# Altium PCB pcb_LAB_main.PcbDoc
Units mil, origin at the board's own origin, x right, y up, seen from the top; angles counter-clockwise.
Board outline 6750 x 6451.58 mil, 2 copper layers (Top Layer, Bottom Layer); 127 components, 63 nets, 386 pads, 33 vias.
Unrouted connection lines stored in the file: 1.
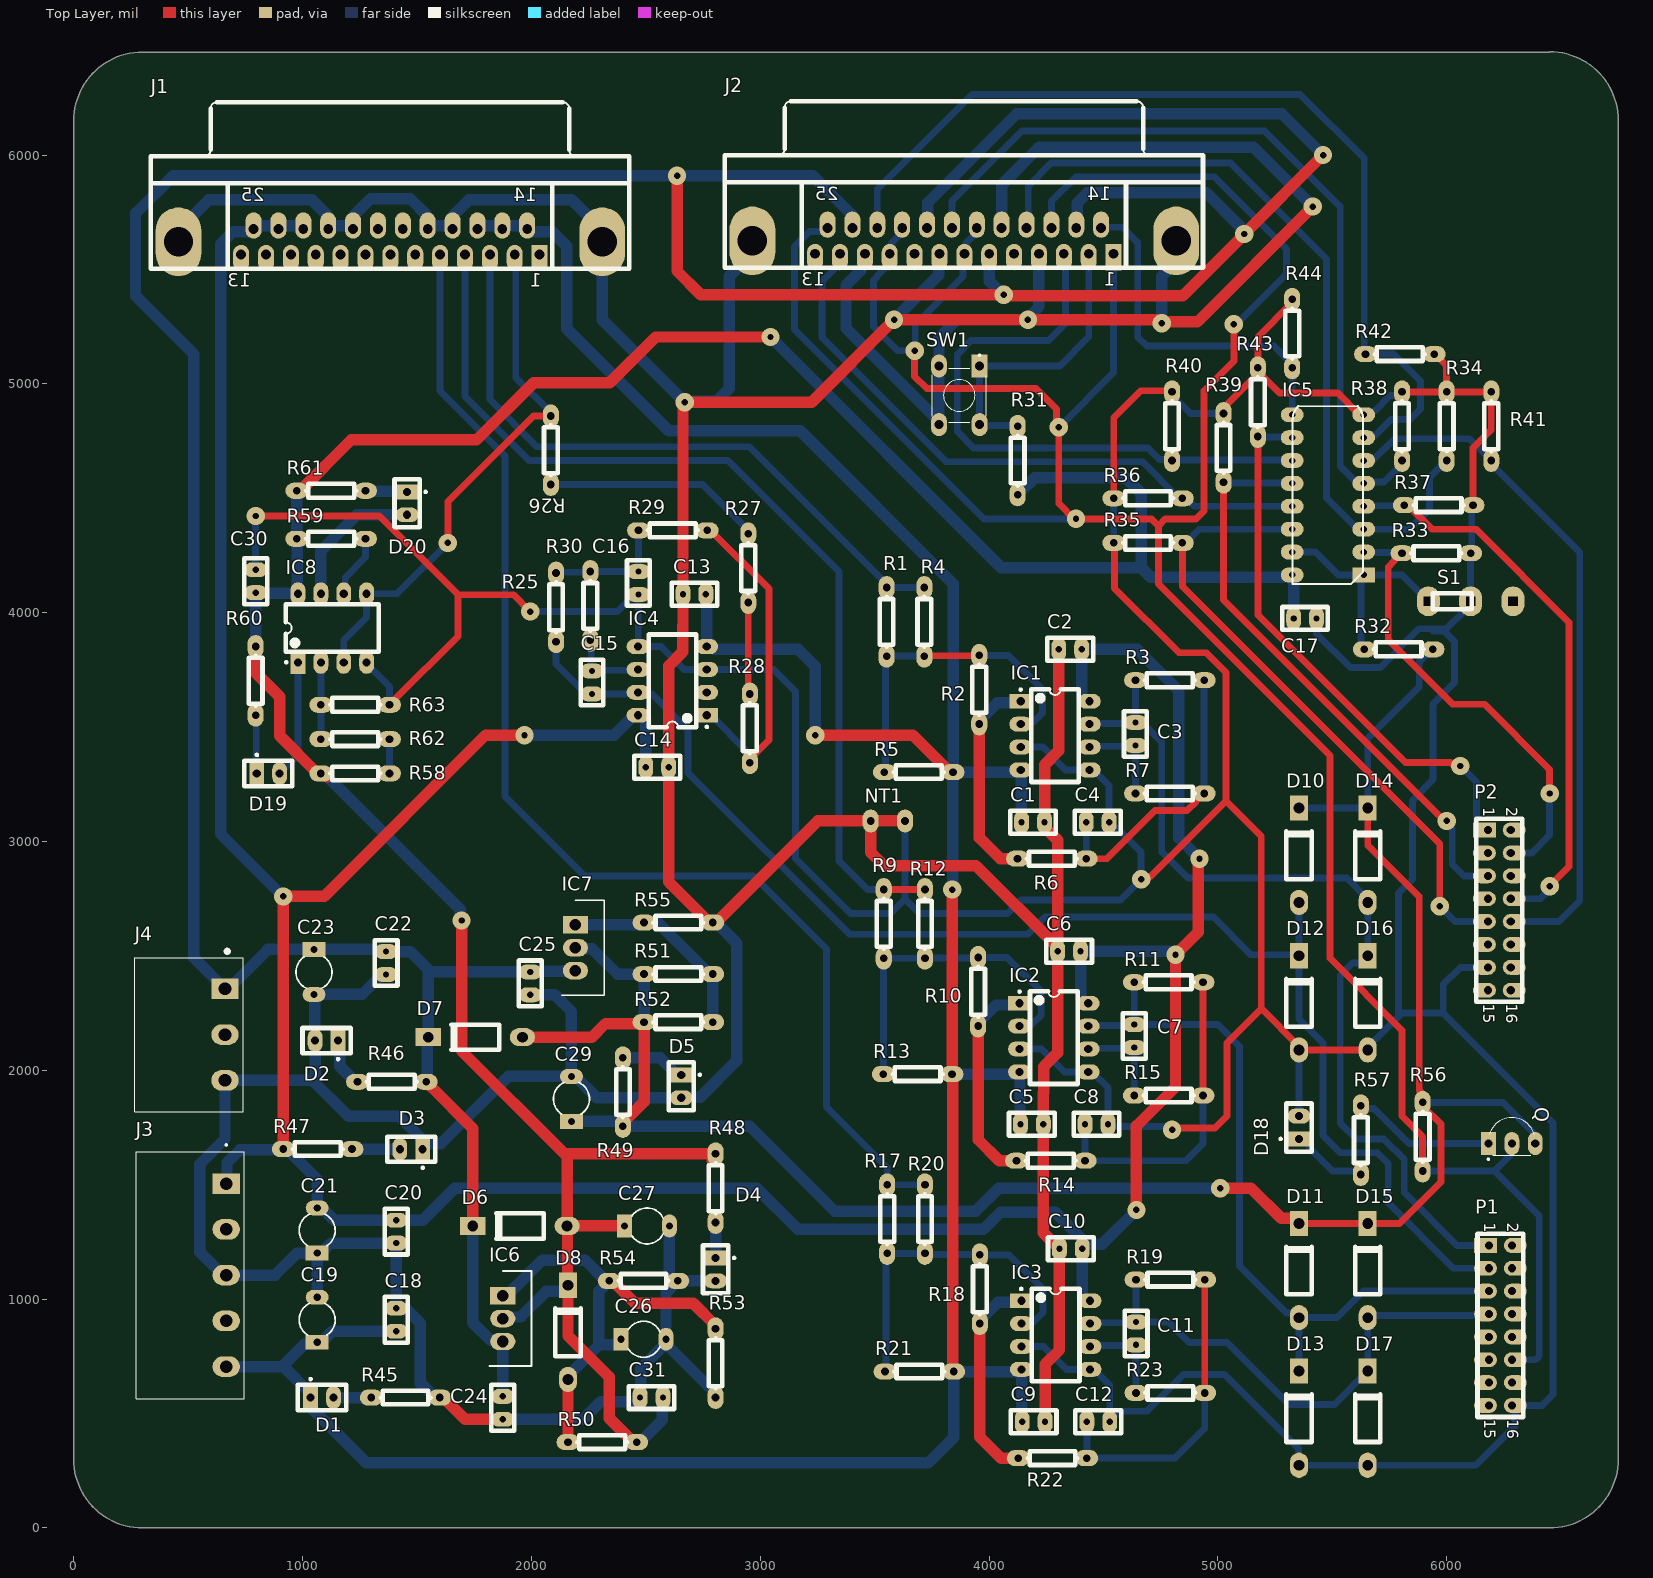
[diagram p0: Top Layer view]
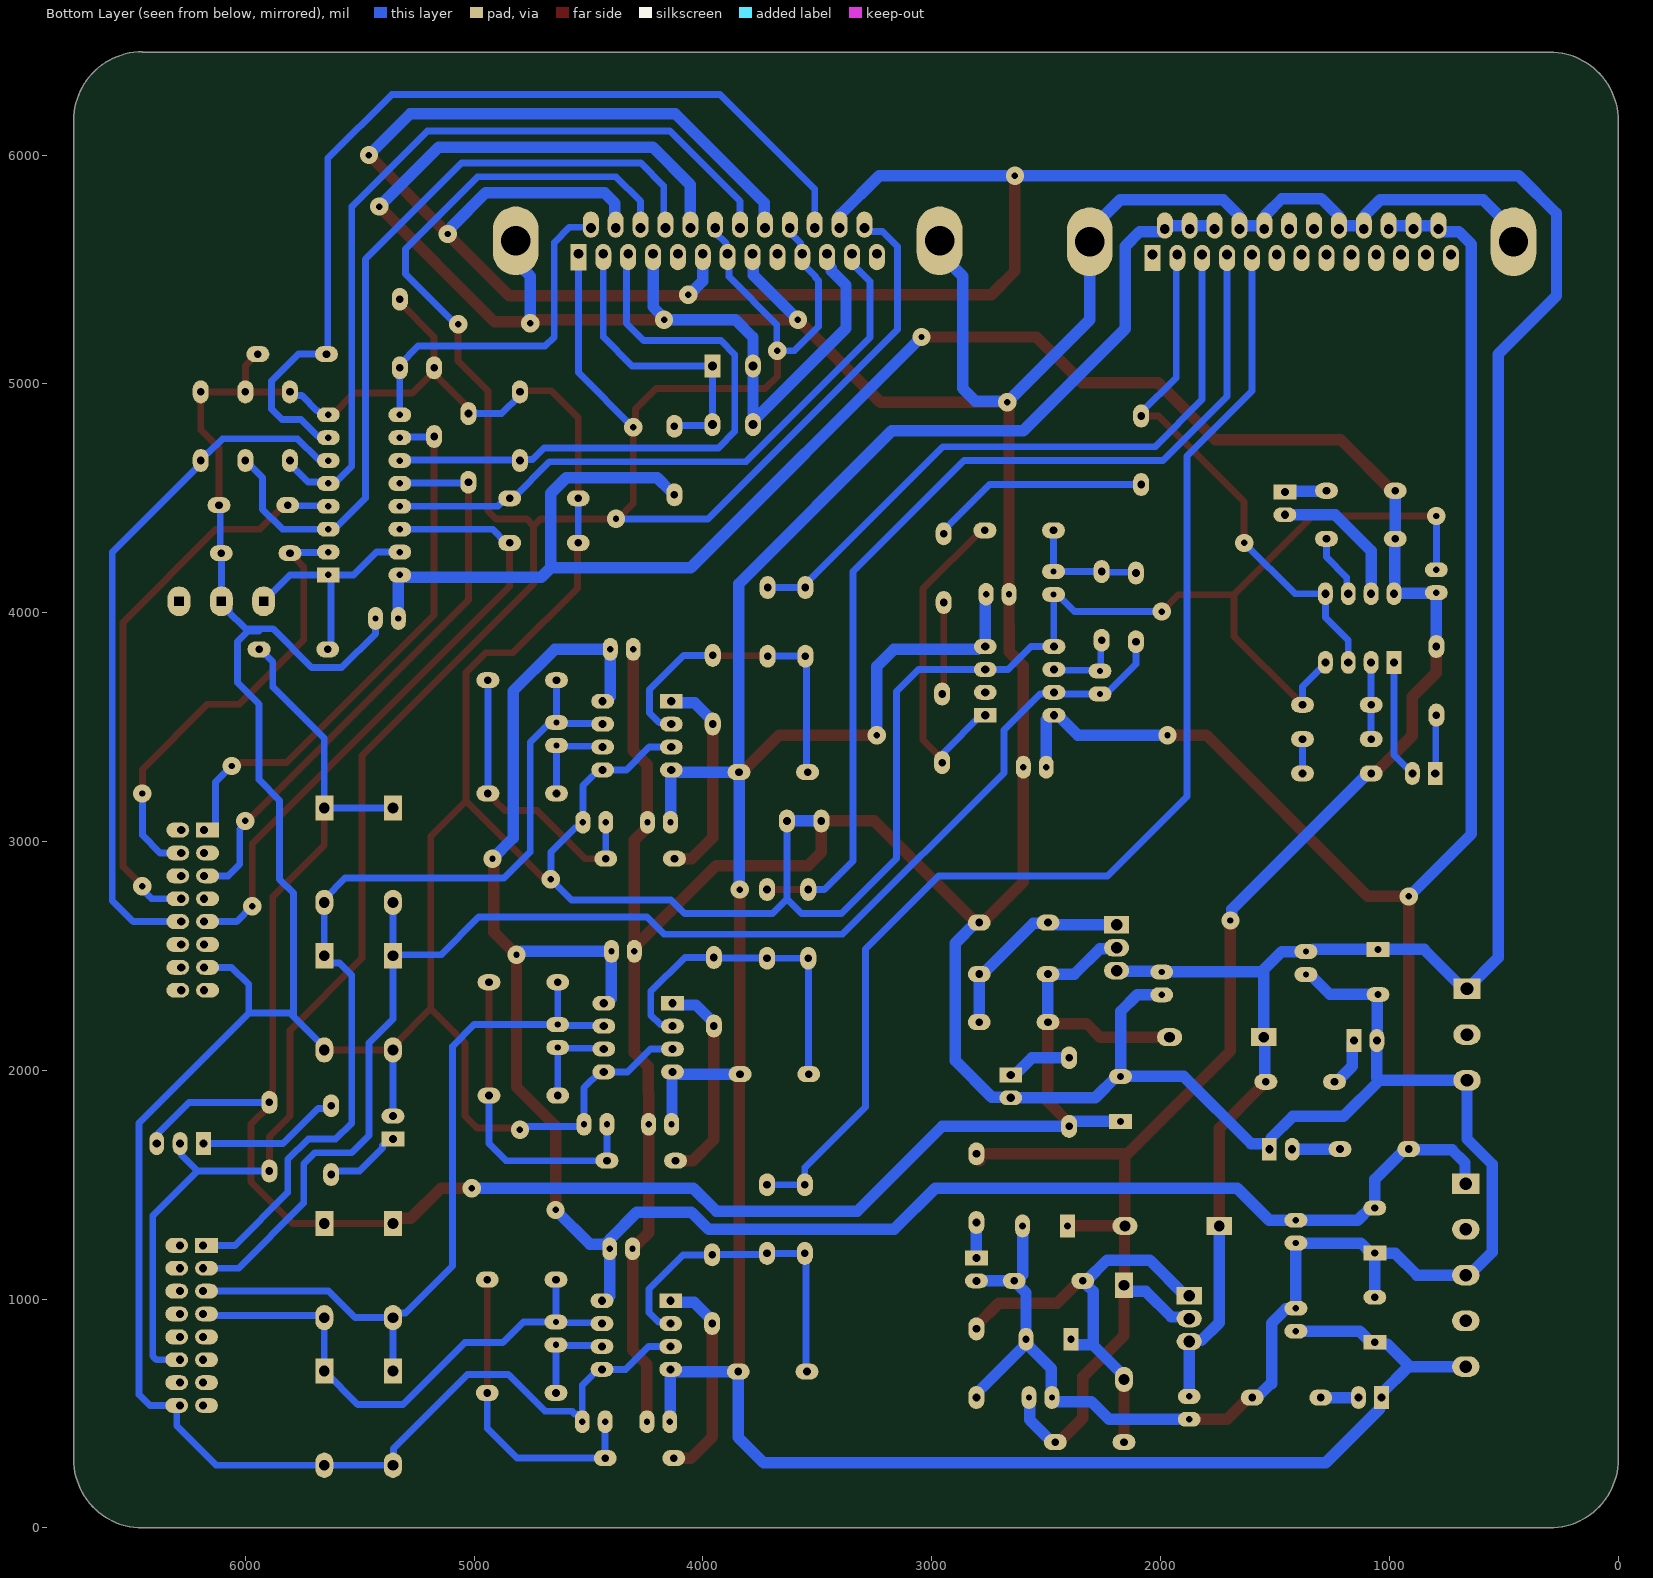
[diagram p1: Bottom Layer view, seen from below]

## Layer stack, top to bottom
Top Solder: solder mask 0.4, Solder Resist, Dk 3.5
Top Layer: signal copper 1.4
Dielectric 1: dielectric 12.6, FR-4, Dk 4.8
Bottom Layer: signal copper 1.4
Bottom Solder: solder mask 0.4, Solder Resist, Dk 3.5

## Board outline
0,300 0,6150 cw(c300,6150) 300,6450 6450,6450 6450,6451.57 cw(c6450,6151.57) 6750,6151.57 6750,300 cw(c6450,300) 6450,0 300,0 cw(c300,300)

## Design rules (kind name [scope] priority, off if disabled: settings)
Clearance [All] p1: gap=40 ignorepadtopadclearanceinfootprint=FALSE except(10: Arc-SMDPad Arc-Text Arc-Hole Track-SMDPad Track-Text Track-Hole SMDPad-SMDPad SMDPad-THPad SMDPad-Text SMDPad-Hole THPad-THPad THPad-Text THPad-Hole Via-Text Via-Hole Fill-Text Fill-Hole Poly-Text Poly-Hole Region-Text Region-Hole Text-Text Text-Hole; 30: Arc-Arc Arc-Track Arc-THPad Arc-Via Track-Track Track-THPad Track-Via SMDPad-Via THPad-Via Via-Via)
PolygonConnect [All] p1: connectstyle=Direct reliefconductorwidth=10 reliefentries=4 polygonreliefangle="90 Angle" airgapwidth=10
RoomDefinition Texas_ADC [InComponentClass('Texas_ADC')] p1: confinementstyle=ConfineIn formatcopy=TRUE lockcomponents=FALSE outline 6612.5,80.11 6612.5,3345 5243.29,3345 5243.29,80.11
RoomDefinition Guasch_Control [InComponentClass('Guasch_Control')] p2: confinementstyle=ConfineIn formatcopy=TRUE lockcomponents=FALSE outline 5250,4410 5250,6285 2565,6285 2565,4410
RoomDefinition CurrentU_Signal [InComponentClass('CurrentU_Signal')] p3: confinementstyle=ConfineIn formatcopy=TRUE lockcomponents=FALSE outline 5097.35,4185 3410,4185 3410,2820 5097.35,2820
RoomDefinition PWM_Driver [InComponentClass('PWM_Driver')] p4: confinementstyle=ConfineIn formatcopy=TRUE lockcomponents=FALSE outline 6720,5445 4371.3,5445 4371.3,3615 6720,3615
RoomDefinition CurrentV_Signal [InComponentClass('CurrentV_Signal')] p5: confinementstyle=ConfineIn formatcopy=TRUE lockcomponents=FALSE outline 5092.35,2871.58 3405,2871.58 3405,1500 5092.35,1500
RoomDefinition Voltage_Signal [InComponentClass('Voltage_Signal')] p6: confinementstyle=ConfineIn formatcopy=TRUE lockcomponents=FALSE outline 1965,3195.16 3307.9,3195.16 3307.9,4935 1965,4935
RoomDefinition Power_Supply [InComponentClass('Power_Supply')] p7: confinementstyle=ConfineIn formatcopy=TRUE lockcomponents=FALSE outline 190,3075 190,105 3115,105 3115,3075
RoomDefinition Guasch_Sensor [InComponentClass('Guasch_Sensor')] p8: confinementstyle=ConfineIn formatcopy=TRUE lockcomponents=FALSE outline 2678.78,5244.92 2678.78,6274.92 203.78,6274.92 203.78,5244.92
RoomDefinition VDC_Indicator [InComponentClass('VDC_Indicator')] p9: confinementstyle=ConfineIn formatcopy=TRUE lockcomponents=FALSE outline 557.02,4697.96 557.02,3077.96 1579.52,3077.96 1579.52,4697.96
RoomDefinition CurrentW_Signal [InComponentClass('CurrentW_Signal')] p10: confinementstyle=ConfineIn formatcopy=TRUE lockcomponents=FALSE outline 5100,1560 3412.65,1560 3412.65,200.16 5100,200.16
RoomDefinition Texas_PWM [InComponentClass('Texas_PWM')] p11: confinementstyle=ConfineIn formatcopy=TRUE lockcomponents=FALSE outline 5985,2160 6525,2160 6525,3540 5985,3540
RoutingVias [All] p1: holewidth=30 width=80 viastyle="Through Hole" minholewidth=30 minwidth=80 maxholewidth=30 maxwidth=80
SolderMaskExpansion [All] p1: expansion=4 istentingtop=FALSE
SupplyNets "Schematic Supply Nets_6" [InNet('sigGND')] p1: voltage=0.000
SupplyNets "Schematic Supply Nets_5" [InNet('GND')] p2: voltage=0.000
SupplyNets "Schematic Supply Nets_4" [InNet('+12V')] p3: voltage=0.000
SupplyNets "Schematic Supply Nets_3" [InNet('+5V')] p4: voltage=0.000
SupplyNets "Schematic Supply Nets_2" [InNet('+3V3')] p5: voltage=0.000
SupplyNets "Schematic Supply Nets_1" [InNet('-15V')] p6: voltage=0.000
SupplyNets "Schematic Supply Nets" [InNet('+15V')] p7: voltage=0.000
Width Width_sigGND [InNet('sigGND')] p1: maxlimit=30 minlimit=30 preferedwidth=30
Width Width_Supply [InNetClass('Supply')] p2: maxlimit=50 minlimit=50 preferedwidth=50
Width Width_5V [InNet('+5V')] p3: maxlimit=50 minlimit=50 preferedwidth=50
Width Width_3V3 [InNet('+3V3')] p4: maxlimit=50 minlimit=30 preferedwidth=30 minimp=50.000000 maximp=50.000000 favimp=50.000000
Width [All] p5: maxlimit=50 minlimit=30 preferedwidth=30
30 further rules are at their usual default settings.

## Classes and differential pairs
component class main: NT1
net class Supply: +12V +15V -15V GND
component class Voltage_Signal: C13 C14 C15 C16 IC4 R25 R26 R27 R28 R29 R30
component class VDC_Indicator: C30 D19 D20 IC8 R58 R59 R60 R61 R62 R63
component class Texas_PWM: P2
component class Texas_ADC: D10 D11 D12 D13 D14 D15 D16 D17 D18 P1 Q R56 R57
component class PWM_Driver: C17 IC5 R32 R33 R34 R35 R36 R37 R38 R39 R40 R41 R42 R43 R44 S1
component class Power_Supply: C18 C19 C20 C21 C22 C23 C24 C25 C26 C27 C29 C31 D1 D2 D3 D4 D5 D6 D7 D8 IC6 IC7 J3 J4 R45 R46 R47 R48 R49 R50 R51 R52 R53 R54 R55
component class Guasch_Sensor: J1
component class Guasch_Control: J2 R31 SW1
component class CurrentW_Signal: C9 C10 C11 C12 IC3 R17 R18 R19 R20 R21 R22 R23
component class CurrentV_Signal: C5 C6 C7 C8 IC2 R9 R10 R11 R12 R13 R14 R15
component class CurrentU_Signal: C1 C2 C3 C4 IC1 R1 R2 R3 R4 R5 R6 R7

## Components (designator, comment, footprint, x,y, rotation, side; value= is the part's Value field where it differs from the comment)
C1 "Cap No Pol" RAD-0.1_mod 4192.35,3084.27 r0 top value=100nF
C2 "Cap No Pol" RAD-0.1_mod 4355,3840 r0 top value=100nF
C3 "Cap No Pol" RAD-0.1_mod 4640,3470 r90 top value=10nF
C4 "Cap No Pol" RAD-0.1_mod 4474.85,3084.27 r0 top value=47nF
C5 "Cap No Pol" RAD-0.1_mod 4187.35,1764.27 r0 top value=100nF
C6 "Cap No Pol" RAD-0.1_mod 4350,2520 r0 top value=100nF
C7 "Cap No Pol" RAD-0.1_mod 4635,2150 r90 top value=10nF
C8 "Cap No Pol" RAD-0.1_mod 4469.85,1764.27 r0 top value=47nF
C9 "Cap No Pol" RAD-0.1_mod 4195,464.43 r0 top value=100nF
C10 "Cap No Pol" RAD-0.1_mod 4357.65,1220.16 r0 top value=100nF
C11 "Cap No Pol" RAD-0.1_mod 4642.65,850.16 r90 top value=10nF
C12 "Cap No Pol" RAD-0.1_mod 4477.5,464.43 r0 top value=47nF
C13 "Cap No Pol" RAD-0.1_mod 2712.65,4080.73 r180 top value=100nF
C14 "Cap No Pol" RAD-0.1_mod 2550,3325 r180 top value=100nF
C15 "Cap No Pol" RAD-0.1_mod 2265,3695 r270 top value=10nF
C16 "Cap No Pol" RAD-0.1_mod 2467.9,4129.74 r90 top value=47nF
C17 "Cap No Pol" RAD-0.1_mod 5381.3,3975 r0 top value=100nF
C18 "Cap No Pol" RAD-0.1_mod 1408.84,910.01 r90 top value=100nF
C19 "Cap Pol" CAPR5-4X5_mod 1063.84,910.01 r90 top value=220uF
C20 "Cap No Pol" RAD-0.1_mod 1408.84,1295.01 r90 top value=100nF
C21 "Cap Pol" CAPR5-4X5_mod 1063.84,1300.01 r90 top value=220uF
C22 "Cap No Pol" RAD-0.1_mod 1365,2469.09 r270 top value=100nF
C23 "Cap Pol" CAPR5-4X5_mod 1050,2430 r270 top value=220uF
C24 "Cap No Pol" RAD-0.1_mod 1875,525 r270 top value=100nF
C25 "Cap No Pol" RAD-0.1_mod 1995,2380 r270 top value=220uF
C26 "Cap Pol" CAPR5-4X5_mod 2490,825 r0 top value=10uF
C27 "Cap Pol" CAPR5-4X5_mod 2505,1320 r0 top value=1uF
C29 "Cap Pol" CAPR5-4X5_mod 2175,1875 r90 top value=10uF
C30 "Cap No Pol" RAD-0.1_mod 795,4137.55 r90 top value=100nF
C31 "Cap No Pol" RAD-0.1_mod 2525,570 r180 top value=100nF
D1 "LED1" PIN2_mod 1035,570 r0 top
D2 "LED1" PIN2_mod 1155,2130 r180 top
D3 "LED1" PIN2_mod 1525,1655 r180 top
D4 "LED1" PIN2_mod 2805,1180 r270 top
D5 "LED1" PIN2_mod 2655,1980 r270 top
D6 "Diode 1N4007" DO-41_mod 1950,1320 r180 top
D7 "Diode 1N4007" DO-41_mod 1755,2145 r180 top
D8 "Diode 1N4007" DO-41_mod 2160,855 r90 top
D10 "Diode BAT54" DO-41_mod 5355,2940 r90 top
D11 "Diode BAT54" DO-41_mod 5355,1125 r90 top
D12 "Diode BAT54" DO-41_mod 5355,2295 r90 top
D13 "Diode BAT54" DO-41_mod 5355,480 r90 top
D14 "Diode BAT54" DO-41_mod 5655,2940 r90 top
D15 "Diode BAT54" DO-41_mod 5655,1125 r90 top
D16 "Diode BAT54" DO-41_mod 5655,2295 r90 top
D17 "Diode BAT54" DO-41_mod 5655,480 r90 top
D18 "LED1" PIN2_mod 5355,1700 r90 top
D19 "LED1" PIN2_mod 800,3297.55 r0 top
D20 "LED1" PIN2_mod 1457.02,4527.96 r270 top
IC1 "OPAMP" DIP-8_mod 4288.48,3463.04 r0 top
IC2 "OPAMP" DIP-8_mod 4283.48,2143.04 r0 top
IC3 "OPAMP" DIP-8_mod 4291.14,843.21 r0 top
IC4 "OPAMP" DIP-8_mod 2616.51,3701.96 r180 top
IC5 "CD74HC367E" DIP-16_mod 5481.3,4515 r180 top
IC6 "LM317AT_NOPB" TO254_mod 1875,1015 r270 top
IC7 "LM317AT_NOPB" TO254_mod 2192.5,2635.76 r270 top
IC8 "LM393P" DIP-8_mod 1130,3932.96 r90 top
J1 "D Connector 25" DSUB1.385-2H25A_mod 1383.78,5994.92 r180 top
J2 "D Connector 25" DSUB1.385-2H25A_mod 3892.2,5999.02 r180 top
J3 "5-Pin Header (supply)" MSTBA_5-PIN_HEADER_mod 508.84,1105.01 r270 top
J4 "3-Pin Header (supply)" MSTBA_3-PIN_HEADER_mod 661,2155.99 r270 top
NT1 "NT_GND" NetTie_GND 3557.91,3090 r180 top net-tie
P1 "Header 8X2" HDR2X8_mod 6185,1235 r270 top
P2 "Header 8X2" HDR2X8_mod 6180,3050 r270 top
Q "BC557BRL1G" TO92260P520H933-3_mod 6285,1723.8 r0 top
R1 "Res1" AXIAL-0.3_mod 3552.35,3960 r270 top value=68k
R2 "Res1" AXIAL-0.3_mod 3957.35,3663.48 r270 top value=6k8
R3 "Res1" AXIAL-0.3_mod 4790,3705 r180 top value=6k8
R4 "Res1" AXIAL-0.3_mod 3717.35,3960 r270 top value=68k
R5 "Res1" AXIAL-0.3_mod 3692.91,3303.48 r180 top value=68k
R6 "Res1" AXIAL-0.3_mod 4274.85,2925 r0 top value=6k8
R7 "Res1" AXIAL-0.3_mod 4790,3210 r180 top value=4k3
R9 "Res1" AXIAL-0.3_mod 3540,2640 r270 top value=68k
R10 "Res1" AXIAL-0.3_mod 3952.35,2343.48 r270 top value=6k8
R11 "Res1" AXIAL-0.3_mod 4785,2385 r180 top value=6k8
R12 "Res1" AXIAL-0.3_mod 3720,2640 r270 top value=68k
R13 "Res1" AXIAL-0.3_mod 3687.91,1983.48 r180 top value=68k
R14 "Res1" AXIAL-0.3_mod 4269.85,1605 r0 top value=6k8
R15 "Res1" AXIAL-0.3_mod 4785,1890 r180 top value=4k3k
R17 "Res1" AXIAL-0.3_mod 3555,1350 r270 top value=68k
R18 "Res1" AXIAL-0.3_mod 3960,1043.64 r270 top value=6k8
R19 "Res1" AXIAL-0.3_mod 4792.65,1085.16 r180 top value=6k8
R20 "Res1" AXIAL-0.3_mod 3720,1350 r270 top value=68k
R21 "Res1" AXIAL-0.3_mod 3695.57,683.64 r180 top value=68k
R22 "Res1" AXIAL-0.3_mod 4277.5,305.16 r0 top value=6k8
R23 "Res1" AXIAL-0.3_mod 4792.65,590.16 r180 top value=4k3
R25 "Res1" AXIAL-0.3_mod 2107.9,4023.48 r270 top value=6k8
R26 "Res1" AXIAL-0.3_mod 2085,4710 r270 top value=15k
R27 "Res1" AXIAL-0.3_mod 2947.9,4194.74 r270 top value=12k
R28 "Res1" AXIAL-0.3_mod 2955,3495 r270 top value=6k8
R29 "Res1" AXIAL-0.3_mod 2617.9,4359.74 r180 top value=6k8
R30 "Res1" AXIAL-0.3_mod 2257.9,4029.74 r270 top value=4k3
R31 "Res1" AXIAL-0.3_mod 4125,4665 r270 top value=9k1
R32 "Res1" AXIAL-0.3_mod 5790,3840 r0 top value=9k1
R33 "Res1" AXIAL-0.3_mod 5955,4260 r180 top value=910
R34 "Res1" AXIAL-0.3_mod 6000,4815 r270 top value=910
R35 "Res1" AXIAL-0.3_mod 4695,4305 r0 top value=910
R36 "Res1" AXIAL-0.3_mod 4695,4500 r0 top value=910
R37 "Res1" AXIAL-0.3_mod 5965,4470 r180 top value=910
R38 "Res1" AXIAL-0.3_mod 5805,4815 r270 top value=910
R39 "Res1" AXIAL-0.3_mod 5025,4720.25 r270 top value=910
R40 "Res1" AXIAL-0.3_mod 4800,4815 r270 top value=910
R41 "Res1" AXIAL-0.3_mod 6195,4815 r270 top value=910
R42 "Res1" AXIAL-0.3_mod 5795.25,5130 r180 top value=910
R43 "Res1" AXIAL-0.3_mod 5175,4920 r270 top value=910
R44 "Res1" AXIAL-0.3_mod 5325,5220 r270 top value=910
R45 "Res1" AXIAL-0.3_mod 1450,570 r0 top value=620
R46 "Res1" AXIAL-0.3_mod 1390,1950 r180 top value=505
R47 "Res1" AXIAL-0.3_mod 1066,1655.99 r180 top value=620
R48 "Res1" AXIAL-0.3_mod 2805,1485 r270 top value=150
R49 "Res1" AXIAL-0.3_mod 2400,1905 r90 top value=68
R50 "Res1" AXIAL-0.3_mod 2310,375 r180 top value=300
R51 "Res1" AXIAL-0.3_mod 2642.5,2420.76 r0 top value=1k
R52 "Res1" AXIAL-0.3_mod 2642.5,2210.76 r0 top value=1k
R53 "Res1" AXIAL-0.3_mod 2805,720 r270 top value=1k8
R54 "Res1" AXIAL-0.3_mod 2490,1080 r0 top value=1k8
R55 "Res1" AXIAL-0.3_mod 2642.5,2645.76 r0 top value=820
R56 "Res1" AXIAL-0.3_mod 5895,1710 r270 top value=9k1
R57 "Res1" AXIAL-0.3_mod 5625,1695 r270 top value=47
R58 "Res1" AXIAL-0.3_mod 1230,3297.55 r180 top value=47k
R59 "Res1" AXIAL-0.3_mod 1125,4322.96 r180 top value=9k1
R60 "Res1" AXIAL-0.3_mod 795,3702.55 r90 top value=150
R61 "Res1" AXIAL-0.3_mod 1125,4532.96 r180 top value=150
R62 "Res1" AXIAL-0.3_mod 1230,3447.55 r0 top value=2k7
R63 "Res1" AXIAL-0.3_mod 1230,3597.55 r180 top value=1k8
S1 "SW-SPDT" MHDR1X3_mod 5975,4050 r0 top
SW1 "1825910-6" SW_1825910-6-4_mod 3870,4950 r270 top

## Footprints (in the part's own frame and the unit in brackets; to place one, negate y for a bottom-side part, rotate by r counter-clockwise, add the part's x,y. Pads: shape width x height; smd on the part's side, far side on the other; paste and mask are expansions set on the pad)
AXIAL-0.3_mod [mil]
  oval 100x70 hole 33.46: 1(-150,0) 2(150,0)
  silkscreen extent -109,-30 109,30
CAPR5-4X5_mod [mm]
  rect 1.651x2.54 hole 0.8: 1(-2.5,0)
  oval 1.651x2.54 hole 0.8: 2(2.5,0)
  silkscreen extent -1.69,-2 1.82,2
DIP-8_mod [mil]
  rect 100x65 hole 35.43: 1(-150,150)
  oval 100x65 hole 35.43: 2(-150,50) 3(-150,-50) 4(-150,-150) 5(150,-150) 6(150,-50) 7(150,50) 8(150,150)
  silkscreen extent -155,-203 104,206, body extent -142,-203 142,203, height 200
DIP-16_mod [mm]
  rect 2.54x1.651 hole 0.73: 1(-3.97,8.89)
  oval 2.54x1.651 hole 0.73: 2(-3.97,6.35) 3(-3.97,3.81) 4(-3.97,1.27) 5(-3.97,-1.27) 6(-3.97,-3.81) 7(-3.97,-6.35) 8(-3.97,-8.89) 9(3.97,-8.89) 10(3.97,-6.35) 11(3.97,-3.81) 12(3.97,-1.27) 13(3.97,1.27) 14(3.97,3.81) 15(3.97,6.35) 16(3.97,8.89)
  silkscreen extent -3.9,-9.84 3.94,9.91, body extent -3.94,-9.84 3.94,9.84, height 5.27
DO-41_mod [mm]
  oval 2.794x2 hole 1.2: 1(-5.23,0)
  rect 2.794x2 hole 1.2: 2(5.23,0)
  silkscreen extent -2.65,-1.4 2.75,1.4
DSUB1.385-2H25A_mod [mm]
  rect 1.778x2.921 hole 1.09 copper offset 0,0.381: 1(-16.566,10.92)
  oval 1.778x2.921 hole 1.09 copper offset 0,0.381: 2(-13.805,10.92) 3(-11.044,10.92) 4(-8.283,10.92) 5(-5.522,10.92) 6(-2.761,10.92) 7(0,10.92) 8(2.761,10.92) 9(5.522,10.92) 10(8.283,10.92) 11(11.044,10.92) 12(13.805,10.92) 13(16.566,10.92)
  oval 1.778x2.921 hole 1.09 copper offset 0,-0.381: 14(-15.185,8.08) 15(-12.425,8.08) 16(-9.663,8.08) 17(-6.903,8.08) 18(-4.141,8.08) 19(-1.38,8.08) 20(1.38,8.08) 21(4.142,8.08) 22(6.903,8.08) 23(9.664,8.08) 24(12.425,8.08) 25(15.185,8.08)
  oval 5.08x7.62 hole 3.26: 26(-23.526,9.5) 27(23.526,9.5)
  silkscreen extent -26.5,-6 26.6,12.5
HDR2X8_mod [mil]
  rect 65x100 hole 35.43 copper offset 0,-15: 1(0,0)
  oval 65x100 hole 35.43 copper offset 0,15: 2(0,100) 4(100,100) 6(200,100) 8(300,100) 10(400,100) 12(500,100) 14(600,100) 16(700,100)
  oval 65x100 hole 35.43 copper offset 0,-15: 3(100,0) 5(200,0) 7(300,0) 9(400,0) 11(500,0) 13(600,0) 15(700,0)
  silkscreen extent -50,-50 750,150
MHDR1X3_mod [mil]
  oval 100x130 hole 40 square: 1(-55,0) 2(130,0) 3(315,0)
  silkscreen extent -35,-35 135,35
MSTBA_3-PIN_HEADER_mod [mil]
  rect 90x120 hole 55.12: 1(-200,0)
  oval 90x120 hole 55.12: 2(0,0) 3(200,0)
  silkscreen extent -372,-394 336,79
MSTBA_5-PIN_HEADER_mod [mil]
  rect 90x120 / inner oval 90x120 / far side rect 90x120 hole 55.12: 1(-400,157.48)
  oval 90x120 hole 55.12: 2(-200,157.48) 3(0,157.48) 4(200,157.48) 5(400,157.48)
  silkscreen extent -573,-236 539,236
NetTie_GND [mil] "Net Tie for GND, through hole"
  oval 70x100 hole 33.46 mask-100: 0(-75,0) 1(75,0)
  Top Layer region: -50,-25 50,-25 50,25 -50,25
  Bottom Layer region: -50,-25 50,-25 50,25 -50,25
PIN2_mod [mil]
  rect 65x100 hole 35.43: 1(0,0)
  oval 65x100 hole 35.43: 2(100,0)
  silkscreen extent -55,-55 155,86
RAD-0.1_mod [mil]
  oval 65x100 hole 27.56: 1(-50,0) 2(50,0)
  silkscreen extent -100,-50 100,50
SW_1825910-6-4_mod [mm]
  rect 2.54x1.778 hole 0.99: 1(-3.25,2.25)
  oval 2.54x1.778 hole 0.99: 2(3.25,2.25) 3(-3.25,-2.25) 4(3.25,-2.25)
  silkscreen extent -4.54,-3 3,3, body extent -3,-3.9 3,3.9, height 5.01
TO254_mod [mm]
  rect 1.935x2.794 hole 1.29: 1(0,0)
  oval 1.935x2.794 hole 1.29: 2(2.54,0) 3(5.08,0)
  silkscreen extent -2.73,-1.5 7.81,3.2, body extent -2.54,-1.43 7.62,3.14, height 19.38
TO92260P520H933-3_mod [mm]
  rect 1.651x2.54 hole 0.91: 1(-2.6,-1.113)
  oval 1.651x2.54 hole 0.91: 2(0,-1.113) 3(2.6,-1.113)
  silkscreen extent -2.7,-2.94 2.49,1.77

## Part data
C1 C2 C3 C4 C5 C6 C7 C8 C9 C10 C11 C12 C13 C14 C15 C16 C17 C18 C20 C22 C24 C25 C30 C31: "Polarized Capacitor (Radial)", LatestRevisionDate=17-Jul-2002, LatestRevisionNote="Re-released for DXP Platform.", PackageDescription="Polarized Capacitor (Radial); 2 Leads", PackageReference=RB7.6-15, Published=8-Jun-2000, Publisher="Altium Limited"
C19 C21 C23 C26 C27 C29: "Capacitor", PackageDescription="Capacitor; 2 Leads", PackageReference=CAPR5-4X5, Published=23-Sep-2002, Publisher="Altium Limited"
D1 D2 D3 D4 D5 D18 D19 D20: "Typical RED GaAs LED", LatestRevisionDate=08-Jul-2005, LatestRevisionNote="Mech Layer 1 removed.", PackageDescription="LED; 2 Leads", PackageReference=LED-1, Published=8-Jun-2000, Publisher="Altium Limited"
D6 D7 D8: "1 Amp General Purpose Rectifier", Code_JEDEC=DO-204-AL, ComponentLink1Description="Manufacturer Link", ComponentLink1URL=http://www.fairchildsemi.com/, ComponentLink2Description=Datasheet, ComponentLink2URL=http://www.fairchildsemi.com/ds/1N%2F1N4001.pdf, DatasheetVersion=1998, LatestRevisionDate=17-Jul-2002, LatestRevisionNote="Re-released for DXP Platform.", PackageDescription="Diode, Axial; Body 5.2 x 2.7 mm (LxDia. max), Lead Dia. 0.86 mm (max)", PackageReference=DO-41, PackageVersion=Aug-1999, Published=8-Jun-2000, Publisher="Altium Limited"
D10 D11 D12 D13 D14 D15 D16 D17: library part "Diode 11DQ03", "Schottky Rectifier", Code_JEDEC=DO-204-AL, ComponentLink1Description="Manufacturer Link", ComponentLink1URL=http://www.irf.com/, ComponentLink2Description=Datasheet, ComponentLink2URL=http://www.irf.com/product-info/datasheets/data/11dq03.pdf, DatasheetVersion=Dec-1997, LatestRevisionDate=17-Jul-2002, LatestRevisionNote="Re-released for DXP Platform.", PackageDescription="Diode, Axial; Body 5.2 x 2.7 mm (LxDia. max), Lead Dia. 0.86 mm (max)", PackageReference=DO-204AL, Published=8-Jun-2000, Publisher="Altium Limited"
IC1 IC2 IC3 IC4: library part ADTL082, "ADTL082"
IC5: "Integrated Circuit", Manufacturer_Name="Texas Instruments", Mouser Part Number=595-CD74HC367E, Datasheet Link=https://www.ti.com/lit/ds/symlink/cd74hc367.pdf?ts=1619589374451&ref_url=https%253A%252F%252Fwww.ti.com%252Fstore%252Fti%252Fen%252Fp%252Fproduct%252F%253Fp%253DCD74HC367E, Height=5.08mm, Manufacturer_Part_Number=CD74HC367E, Mouser Price/Stock=https://www.mouser.co.uk/ProductDetail/Texas-Instruments/CD74HC367E?qs=xFfolx0DHx1dmtXXzN7naA%3D%3D
IC6 IC7: "Integrated Circuit", Arrow Part Number=LM317AT/NOPB, Manufacturer_Name="Texas Instruments", Mouser Part Number=926-LM317AT/NOPB, Arrow Price/Stock=https://www.arrow.com/en/products/lm317atnopb/texas-instruments?region=nac, Datasheet Link=http://www.ti.com/lit/gpn/lm317a, Height=4.7mm, Manufacturer_Part_Number=LM317AT/NOPB, Mouser Price/Stock=https://www.mouser.co.uk/ProductDetail/Texas-Instruments/LM317AT-NOPB?qs=X1J7HmVL2ZFYFJRcNgsWcQ%3D%3D
IC8: library part LM393N, "Integrated Circuit", Manufacturer_Name="Texas Instruments", Mouser Part Number=926-LM393N, Datasheet Link=https://datasheet.datasheetarchive.com/originals/distributors/Datasheets-SFU2/DSASFU100036444.pdf, Height=5.33mm, Manufacturer_Part_Number=LM393N, Mouser Price/Stock=https://www.mouser.co.uk/ProductDetail/Texas-Instruments/LM393N?qs=QbsRYf82W3HvgSG%252BWhL68w%3D%3D
J1 J2: "Receptacle Assembly, 25 Position, Right Angle", PackageDocument=U, DatasheetDocument=19-Mar-1999, Gender=Receptacle, LatestRevisionDate=17-Jul-2002, LatestRevisionNote="Re-released for DXP Platform.", Orientation="Right Angle", PackageReference=787202, Positions=25, Published=15-Jun-2001, Publisher="Altium Limited"
J3: library part 1736175, "Pluggable Terminal Blocks MSTBA 2,5/ 5-G- 5,08 VPE250", Package=None, Check_prices=https://www.snapeda.com/parts/1736175/Phoenix+Contact/view-part/?ref=eda, MF="Phoenix Contact", MP=1736175, SnapEDA_Link=https://www.snapeda.com/parts/1736175/Phoenix+Contact/view-part/?ref=snap
J4: library part MSTBA_2,5/_3-G-5,08_1757255, "3 Position Terminal Block Header, Male Pins, Shrouded _4 Side_ 0.200 _5.08mm_ 90Â°, Right Angle Through Hole", Package=None, Availability=Unavailable, MF="Phoenix Contact", MP="MSTBA 2,5/ 3-G-5,08 1757255", Price=None, SnapEDA_Link=https://www.snapeda.com/parts/MSTBA%202%2C5/%203-G-5%2C08%201757255/Phoenix%20Contact/view-part/1675378/?ref=snap
NT1: library part NetTIe_GND, "Net Tie for GND, at bottom layer"
P1 P2: "Header, 8-Pin, Dual row", LatestRevisionDate=17-Jul-2002, LatestRevisionNote="Re-released for DXP Platform.", Publisher="Altium Limited"
Q: "Bipolar (BJT) Transistor PNP 45V 100mA 320MHz 625mW Through Hole TO-92-3", Package="TO-92 ON Semiconductor", Arrow_Electronics-Purchase-URL=https://snapeda.com/shop?store=Arrow+Electronics&id=3219064, Availability=Good, BuyPart=https://www.snapeda.com/parts/BC557BRL1G/ON%20Semiconductor/view-part/3219064/?ref=eda, DigiKey-Purchase-URL=https://snapeda.com/shop?store=DigiKey&id=3219064, MF="ON Semiconductor", MP=BC557BRL1G, Price=None, SnapEDA_Link=https://www.snapeda.com/parts/BC557BRL1G/ON%20Semiconductor/view-part/3219064/?ref=snap
R1 R2 R3 R4 R5 R6 R7 R9 R10 R11 R12 R13 R14 R15 R17 R18 R19 R20 R21 R22 R23 R25 R26 R27 R28 R29 R30 R31 R32 R33 R34 R35 R36 R37 R38 R39 R40 R41 R42 R43 R44 R45 R46 R47 R48 R49 R50 R51 R52 R53 R54 R55 R56 R57 R58 R59 R60 R61 R62 R63: "Resistor", LatestRevisionDate=17-Jul-2002, LatestRevisionNote="Re-released for DXP Platform.", PackageDescription="Axial Device, Thru-Hole; 2 Leads; 0.3 in Pin Spacing", PackageReference=AXIAL-0.3, Published=8-Jun-2000, Publisher="Altium Limited"
S1: "SPDT Subminiature Toggle Switch, Right Angle Mounting, Vertical Actuation", ComponentLink1Description="Manufacturer Link", ComponentLink1URL=http://www.apem.com, DatasheetVersion=05-Dec-2000, LatestRevisionDate=17-Dec-2003, LatestRevisionNote="Schematic revised, PCB Footprint replaced.", PackageDescription="Switch; 4 Leads", PackageReference=TL36WW15050, Published=24-Mar-1999, Publisher="Altium Limited"
SW1: "Switch Push Button OFF (ON) SPST Round Button 0.05A 24VDC Momentary Contact PC Pins Thru-Hole", Package=None, Check_prices=https://www.snapeda.com/parts/1825910-6/TE+Connectivity+ALCOSWITCH+Switches/view-part/?ref=eda, Digi-Key_Part_Number=450-1650-ND, MF="TE Connectivity", MP=1825910-6, Purchase-URL=https://pricing.snapeda.com/search/part/1825910-6/?ref=eda, SnapEDA_Link=https://www.snapeda.com/parts/1825910-6/TE+Connectivity+ALCOSWITCH+Switches/view-part/?ref=snap

## Via types
v1: diameter 80, hole 28, Top Layer to Bottom Layer, 33 vias

## Nets (pads, with @x,y where several pads share a name; then routed paths per layer and width w, separated by ;. In a path a pad name is that pad's centre, name@x,y a point inside that pad or via, vN(x,y) a via of type N, cw(c..) or ccw(c..) an arc to the next point about the centre after c; other vN are vias at no path point)
+3V3: C29.1 D7.1 D10.2 D11.2 D14.2 D15.2 IC7.2 Q.3 R32.2 R49.1 R51.1 R52.1 R56.1 | length 9223.3
  Top Layer w30: D11.2 D15.2 5794.04,1330.91 5975,1511.86 5975,1765 R56.1@5895,1845 ; D14.2 5655,2984.79 5880,2759.79 5880,1912.57 5887.35,1905.23 5887.35,1867.65 R56.1
  Top Layer w50: D7.1 2265.01,2145 2324.24,2204.23 2485.97,2204.23 R52.1 2492.5,1862.5 2400,1770 R49.1 ; v1(5010,1485) 5145,1485 5276.83,1353.17 5340.63,1353.17 5355,1338.8 D11.2
  Bottom Layer w30: D10.2 D14.2 5655,3450 5880,3675 5880,3784.18 5935.82,3840 R32.2 ; R56.1 6246.24,1860 6384.49,1721.75 6384.49,1682.87 Q.3
  Bottom Layer w50: C29.1 2388.01,1776.57 2400,1764.59 R49.1 2955,1755 3325,1385 3942.3,1385 4042.3,1485 v1(5010,1485) ; IC7.2@2189.51,2538.75 IC7.2 2197.51,2530.75 2266.35,2530.75 2376.34,2420.76 R51.1 R52.1
+5V: C17.1 C27.1 C30.1 C31.1 D6.1 D8.2 IC5.16 IC6.2 IC8.8 R31.2 R48.1 R50.1 R58.2 R59.2 R60.2 R61.2 | length 12819.3
  Top Layer w50: R60.2 795,3737.55 900,3632.55 900,3462.55 1065,3297.55 R58.2 1089.59,3297.55 R58.2@1105,3282.14 ; R61.2 990,4532.96 1212.04,4755 1760.25,4755 2010,5004.75 2342.88,5004.75 2543.14,5205 v1(3045,5205) ; v1(1695,2655) 1695,2085 2145,1635 ; C27.1 D6.1 ; R50.1 2445,375 2340,480 2340,660 2160,840 D8.2 2157.95,1062.95 2157.95,1317.95 D6.1 ; R48.1@2790,1605 R48.1@2790,1620 ; R48.1 2145,1635 ; C17.1 C17.1@5334.17,3972.13 ; 2145,1635 2155.91,1624.09 D6.1
  Bottom Layer w50: R60.2 C30.1 797.29,4085.26 IC8.8@977.71,4085.26 ; R61.2 R59.2 977.5,4320.46 977.5,4085.46 IC8.8@977.71,4085.26 ; IC8.8 IC8.8@977.71,4085.26 ; R58.2 1086.53,3291.02 1101.53,3291.02 1689.26,2703.29 1689.26,2660.74 v1(1695,2655) ; IC6.2 1880.01,920.01 1915.43,920.01 1917.33,921.91 1952.78,921.91 2065.87,1035 2145.63,1035 2160,1049.37 D8.2 ; R50.1 2475,375 2572.13,472.13 2572.13,567.13 C31.1 ; v1(3045,5205) 4053.23,4196.77 4665,4196.77 ; R31.2 4125,4524.59 4134.24,4533.83 4143.83,4533.83 4200,4590 4597.28,4590 4665,4522.28 4665,4196.77 ; C17.1 5331.3,4158.7 IC5.16 5303.44,4165 5293.44,4155 4706.77,4155 4665,4196.77
+12V: C22.1 C23.1 C24.1 C25.1 D6.2 D7.2 IC6.3 IC7.3 J2.6 J2.15 J2.21 J2.24 J4.1 R46.1 | length 17352.1
  Top Layer w50: R46.1 R46.1@1549.59,1950 ; R46.1@1555,1950 R46.1@1549.59,1950 ; D6.2 1744.1,1745.9 1558.83,1931.17 1558.83,1940.76 R46.1@1549.59,1950 ; IC7.3@2175.59,2435.76 IC7.3 ; v1(2636.67,5910) 2636.67,5493.33 2740,5390 v1(4065,5390) 4070,5385 4847.63,5385 5115,5652.37 v1(5115,5655) v1(5460,6000)
  Bottom Layer w50: R46.1 1544.55,1954.55 1544.55,2140.45 D7.2 1549.1,2419.1 1560,2430 ; D6.2 1744.1,897.34 1821.43,820.01 1869.99,820.01 IC6.3 C24.1 ; IC7.3 2189.61,2432.87 1997.87,2432.87 C25.1 1560,2430 ; J2.24 3399.22,5684.73 3399.22,5740.81 3230.04,5910 v1(2636.67,5910) 435,5910 270,5745 270,5385 525,5130 525,2491.99 J4.1 676,2355.99 848.45,2528.43 C23.1 1334.11,2528.43 1343.44,2519.1 C22.1 1470.9,2519.1 1560,2430 ; J2.21 3732.98,5684.73 3732.98,5792.53 4120.45,6180 5280,6180 v1(5460,6000) ; J2.6 4000.9,5449.1 4060,5390 v1(4065,5390) ; J2.15 4385.18,5684.73 4385.18,5790 4430.18,5835 4950,5835 5100,5685 5100,5678.12 5115,5663.12 v1(5115,5655)
+15V: C1.1 C5.1 C9.1 C13.1 C18.1 C19.1 D1.1 IC1.4 IC2.4 IC3.4 IC4.4 J1.14 J1.15 J1.16 J3.5 R5.1 R13.1 R21.1 | length 14042.2
  Top Layer w50: v1(3240,3465) 3666.39,3465 3827.91,3303.48 R5.1 ; v1(3840,2790) 3838.96,2788.96 3838.96,1984.52 R13.1 3841.74,1979.65 3841.74,687.47 R21.1 3855.15,683.64 R21.1@3864.39,692.88
  Bottom Layer w50: J3.5 910.01,705.01 ; C18.1 1129.77,860.01 1081.34,811.58 C19.1 1056.34,804.08 1009.08,804.08 910.01,705.01 ; J1.16 1764.23,5682.57 1773.47,5691.81 1863.7,5691.81 J1.15@1872.93,5682.57 ; J1.15 J1.15@1872.93,5682.57 ; C13.1 2762.65,4059.17 2766.52,4055.31 IC4.4 2788.07,3851.96 2800.03,3840 3165.71,3840 3240,3765.71 v1(3240,3465) ; v1(3840,2790) 3841.46,2791.46 3841.46,3302.02 R5.1 ; R13.1@3840.41,1985.98 R13.1 4102.36,1983.48 4111.93,1993.04 IC2.4 4135.42,1991.11 4135.42,1766.2 C5.1 ; C1.1 4140.42,3086.2 4140.42,3311.11 IC1.4 4116.93,3313.04 4107.36,3303.48 R5.1 ; C9.1@4145,446.93 C9.1 4143.07,466.37 4143.07,691.28 IC3.4 4119.58,693.21 4110.01,683.64 R21.1 3845.57,395.57 3735,285 1278.76,285 1042.5,521.25 1042.5,562.5 D1.1 1035,587.5 917.49,705.01 910.01,705.01 ; J1.15@1872.93,5682.57 1882.17,5691.81 1972.4,5691.81 1981.63,5682.57 J1.14 1981.63,5674.72 1990.87,5665.49 2090.78,5665.49 2155,5601.27 2155,5240.65 2600.65,4795 3174.63,4795 3842.91,4126.71 R5.1
-15V: C2.2 C6.2 C10.2 C14.2 C20.2 C21.2 IC1.8 IC2.8 IC3.8 IC4.8 J1.23 J1.24 J1.25 J3.1 R47.2 | length 15319.2
  Top Layer w50: R47.2 915.5,1656.49 915.5,2759.5 v1(915,2760) 1095,2760 1800,3465 v1(1970,3465) ; v1(4644.16,1390) 4644.16,1756.88 4815,1927.72 v1(4815,2505) 4914.26,2604.26 4914.26,2919.26 v1(4920,2925)
  Bottom Layer w50: J3.1 669.89,1508.57 669.89,1595.72 726.32,1652.16 912.18,1652.16 R47.2 931,1655.98 1063.84,1523.14 C21.2 1085.4,1398.43 1138.83,1345.01 C20.2 1525.01,1345.01 1665,1485 2985,1485 3165,1305 3975.43,1305 4050.43,1380 4289.06,1380 C10.2@4404.78,1264.28 ; J1.24 J1.24@894.63,5682.57 ; v1(915,2760) 641.58,3033.42 641.58,5609.78 697.28,5665.49 776.69,5665.49 785.93,5674.72 J1.25 785.93,5682.57 795.16,5691.81 885.39,5691.81 J1.24@894.63,5682.57 ; J1.23 1003.33,5682.57 994.09,5691.81 903.86,5691.81 J1.24@894.63,5682.57 ; v1(1970,3465) 2362.06,3465 2449.02,3551.96 2479.96,3551.96 2500,3531.91 C14.2 ; C10.2 C10.2@4407.65,1233.61 ; C10.2@4421.55,1247.51 C10.2@4407.65,1233.61 ; IC2.8 4420.04,2293.04 4400,2313.09 C6.2 4791.88,2520 4806.88,2505 v1(4815,2505) ; IC1.8 4425.04,3613.04 4405,3633.09 C2.2 4647.28,3840 4830,3657.28 4830,3015 v1(4920,2925) ; IC3.8 4427.7,993.21 4407.65,1013.25 C10.2@4407.65,1233.61 ; v1(4644.16,1390) 4494.7,1240.53 4414.58,1240.53 C10.2@4407.65,1233.61
"A/D A2": C7.2 D11.1 D13.2 IC2.7 P1.5 R11.2 | length 3313.5
  Bottom Layer w30: IC2.7 4436.96,2196.52 4631.52,2196.52 C7.2 ; R11.2 C7.2 ; D13.2 D11.1 ; P1.5 5635.96,1035 5520.05,919.09 D11.1 ; C7.2 5000,2200 5095,2105 5095,1145 5300.48,939.52 5334.57,939.52 D11.1
"A/D A3": C11.2 D15.1 D17.2 IC3.7 P1.7 R19.2 | length 2381.1
  Bottom Layer w30: IC3.7 4444.62,896.69 4639.18,896.69 C11.2 ; R19.2 C11.2 ; P1.7 6178.3,928.3 5664.21,928.3 D15.1 D17.2 5509.09,540 5310.91,540 5040.91,810 4875,810 4784.84,900.16 C11.2
"A/D A4": C15.2 D10.1 D12.2 IC4.7 P1.3 R25.2 | length 6157
  Bottom Layer w30: R25.2 2107.9,3775 2231.2,3651.7 2258.3,3651.7 C15.2 2466.52,3645 2527.33,3645 2685,3487.33 2685,3300 3390,2595 4170,2595 4245,2670 4980,2670 5145,2505 5350.91,2505 D12.2 5355,2224.04 5460,2119.04 5460,1714.93 5534.93,1640 5695,1640 5745,1590 5745,1420 6030,1135 P1.3 ; D12.2@5355,2516.54 D10.1
"A/D A5": C3.2 D14.1 D16.2 IC1.7 P1.1 R3.2 | length 4013.2
  Bottom Layer w30: IC1.7 4441.96,3516.52 4636.52,3516.52 C3.2 ; R3.2 C3.2 ; P1.1 6045.25,1235 5815,1465.25 5815,1610 5725,1700 5605,1700 5535,1770 5535,2415 5588.95,2468.95 5630.63,2468.95 5655,2493.32 D14.1 5655,2749.72 5564.72,2840 4870,2840 4755,2955 4755,3432.1 4689.6,3497.5 4689.47,3497.5 4666.97,3520 C3.2
Fault: J2.1 J2.7 J2.10 J2.16 J2.19 J2.22 J2.25 P1.12 Q.2 R56.2 | length 13636.6
  Top Layer w30: v1(3675,5145) 3675,5032.95 3727.95,4980 4205.18,4980 4295.43,4889.74 4295.43,4819.57 v1(4305,4810) 4305,4476.42 4371.42,4410 v1(4380,4410) 4710,4410 4740,4380 ; v1(5070,5260) 5070,5100 4940,4970 4940,4445 4905,4410 4770,4410 4740,4380 ; R56.2 5895,1710 5805,1800 5805,2175 5490,2490 5490,3375 4740,4125 4740,4380
  Bottom Layer w30: J2.25 3279.2,5665.75 3216.02,5665.75 3150,5599.73 3150,5237.4 3977.4,4410 v1(4380,4410) ; J2.22 3620.45,5662.58 3573.76,5615.89 3573.76,5576.75 J2.10 3566.1,5527.16 3508.7,5469.76 3508.7,5465.32 3495,5451.62 3495,5250 3600,5145 v1(3675,5145) 3677.78,5147.78 3677.78,5259.03 3887.03,5468.28 3887.03,5563.92 J2.7 3899.86,5576.75 3899.86,5615.89 3946.55,5662.58 J2.19 ; J2.16 4272.66,5798.41 4379.25,5905 4985.21,5905 5300.25,5589.96 5300.25,5480.25 5080,5260 v1(5070,5260) ; v1(4305,4810) 4544.7,5049.7 4544.7,5568.8 J2.1 ; R56.2 6208.78,1560 ; P1.12 6387.29,735 6404.86,752.57 6404.86,1363.92 6208.78,1560 ; Q.2 6278.3,1673.3 6278.3,1629.53 6208.78,1560
GND: C1.2 C2.1 C5.2 C6.1 C9.2 C10.1 C13.2 C14.1 C18.2 C19.2 C20.1 C21.1 C22.2 C23.2 C24.2 C25.2 C26.2 C27.2 C29.2 C31.2 D2.2 D3.1 D4.2 D5.2 J1.17 J1.18 J1.21 J1.22 J1.26 J1.27 J2.4 J2.8 J2.11 J2.18 J2.26 J2.27 J3.3 J4.3 NT1.1 R45.2 R53.2 R54.2 R55.2 SW1.3 SW1.4 | length 29173.7
  Top Layer w50: R45.2 1615,570 1710,475 C24.2 ; C9.2 4245,601.96 4246.14,603.1 4246.14,716.19 4307.65,777.7 C10.1 4307.65,1233.61 4300.72,1240.53 4287.28,1240.53 4237.35,1290.47 C5.2 4237.35,1901.79 4238.48,1902.93 4238.48,2016.02 4300,2077.54 C6.1 C6.1@4300,2537.5 ; C2.1 4305,3397.54 4243.48,3336.02 4243.48,3085.41 C1.2 4242.35,3062.71 4300,3005.06 C6.1@4300,2537.5 ; v1(5414.9,5774.9) 4910.74,5270.74 4760.74,5270.74 v1(4755,5265) 4746.88,5265 4731.88,5280 v1(4170,5280) 4169.95,5280.05 3585.16,5280.05 v1(3585.1,5280.1) 3225,4920 v1(2670,4920) 2670,4911.88 2662.65,4904.54 C13.2 2662.65,3943.21 2661.52,3942.07 2661.52,3828.98 2600,3767.46 C14.1 2600,2823.26 2777.5,2645.76 R55.2 2807.5,2645.76 3251.74,3090 NT1.1 3482.91,2952.09 3540,2895 3942.5,2895 C6.1@4300,2537.5
  Bottom Layer w50: J1.27 457.56,5670.91 590.97,5804.31 1040.6,5804.31 1108.2,5736.72 1108.2,5680.64 J1.22 ; C19.2 C21.1 ; J1.22@1121.27,5691.81 1211.49,5691.81 J1.21@1220.73,5682.57 ; J1.21@1224.55,5680.64 1224.55,5736.72 1297.76,5809.92 1469.8,5809.92 1543,5736.72 J1.18@1543,5680.64 ; C22.2 1347.5,2419.1 1259.98,2331.58 C23.2 1052.5,2329.08 1052.5,2132.5 D2.2 1055,1966.97 1044.01,1955.99 ; D3.1 1517.5,1662.5 1517.5,1703.74 1422.01,1799.23 1200.77,1799.23 1044.01,1955.99 ; D3.1@1525,1672.5 1532.5,1680 1605,1680 1898.42,1973.42 C29.2 ; J1.18@1556.07,5691.81 1646.29,5691.81 J1.17@1655.53,5682.57 ; R45.2 1579.59,570 1519.59,630 1515,630 1515,895.09 1452.96,957.14 1411.71,957.14 C18.2 C20.1 1170.01,1245.01 1124.76,1245 1081.34,1201.58 C21.1 ; J1.17@1659.36,5680.64 1659.36,5736.72 1726.95,5804.31 2176.59,5804.31 2310,5670.91 J1.26 2310,5280 v1(2670,4920) 2675,4925 2810,4925 2865,4980 2865,5470.71 2965.98,5571.69 J2.27 ; C24.2 2225.48,475 2302.98,552.5 2468.07,552.5 2475,559.43 C31.2 2477.87,572.87 2477.87,696.95 C26.2@2588.42,807.5 ; C25.2 2102.5,2330 2175,2257.5 C29.2 ; R54.2@2603.42,1106.99 C27.2 ; R55.2 2807.5,2645.76 2897.5,2555.76 2897.5,2042.5 2737.87,1882.87 2657.87,1882.87 D5.2 2285.92,1880 2192.5,1973.42 C29.2 ; R53.2 2805,587.96 2588.42,804.54 C26.2@2588.42,807.5 ; D4.2 R54.2 2630.41,1080 2621.17,1070.76 2621.17,1061.17 2588.42,1028.42 C26.2 C26.2@2588.42,807.5 ; J2.11 3457.4,5526.18 3438.7,5507.48 3438.7,5494.31 3375,5430.61 3375,5243.46 SW1.4@3781.42,4837.05 ; v1(3585.1,5280.1) 3779.68,5474.68 3779.68,5565.27 J2.8 ; SW1.4 SW1.4@3781.42,4837.05 ; J2.18 4055.66,5681.31 4055.66,5870.66 4220,6035 5154.79,6035 v1(5414.9,5774.9) ; J2.4 4218.31,5336.42 4170,5288.12 v1(4170,5280) 3858.46,5280 3781.42,5202.95 SW1.3 SW1.4@3781.42,4837.05 ; v1(4755,5265) 4755,5470.99 4818.42,5534.41 J2.26 ; 1044.01,1955.99 J4.3 661,1699.98 551.32,1590.3 551.32,1205.01 651.32,1105.01 J3.3 880.01,1105.01 975,1200 1062.26,1200 C21.1
Gsc_VDC: IC8.3 IC8.5 J1.2 R26.1 | length 2344.1
  Top Layer w30: v1(1635,4305) 1635,4485 2010,4860 R26.1
  Bottom Layer w30: IC8.3 1180,3879.61 1280,3979.61 IC8.5 1412.96,4082.96 v1(1635,4305) ; J1.2 1931.46,5560.82 1931.46,5028.54 2085,4875 R26.1
NetC3_1: C3.1 IC1.6 R7.2 | length 417.5
  Bottom Layer w30: IC1.6 4441.96,3416.52 4636.52,3416.52 C3.1 R7.2 R7.2@4637.78,3207.78
NetC4_1: C4.1 R3.1 R6.2 R7.1 | length 1307.4
  Top Layer w30: R6.2 4515,2925 4725,3135 4865,3135 4905.93,3175.93 4905.93,3180.11 4935.82,3210 R7.1 ; C4.1 C4.1@4424.85,3101.77
  Bottom Layer w30: R6.2 C4.1 ; R7.1 R3.1
NetC7_1: C7.1 IC2.6 R15.2 | length 417.5
  Bottom Layer w30: IC2.6 4436.96,2096.52 4631.52,2096.52 C7.1 R15.2 R15.2@4632.78,1887.78
NetC8_1: C8.1 R11.1 R14.2 R15.1 | length 1428.1
  Top Layer w30: C8.1 C8.1@4419.85,1781.77 ; R15.1 R11.1
  Bottom Layer w30: C8.1 R14.2 4860.21,1605 4935,1679.79 R15.1
NetC11_1: C11.1 IC3.6 R23.2 | length 417.5
  Bottom Layer w30: IC3.6 4444.62,796.69 4639.18,796.69 C11.1 R23.2 R23.2@4640.44,587.95
NetC12_1: C12.1 R19.1 R22.2 R23.1 | length 1395.9
  Top Layer w30: C12.1 C12.1@4427.5,481.93 ; R23.1 R19.1
  Bottom Layer w30: C12.1 R22.2 4812.82,305.16 4942.65,435 R23.1
NetC15_1: C15.1 IC4.6 R30.2 | length 342.1
  Bottom Layer w30: R30.2 2261.45,3876.19 2261.45,3748.55 C15.1 2268.48,3748.48 2463.04,3748.48 IC4.6
NetC16_2: C16.2 R25.1 R29.2 R30.1 | length 542.6
  Bottom Layer w30: R25.1 2111.03,4176.61 2254.77,4176.61 R30.1 C16.2 R29.2
NetC26_1: C26.1 D8.1 IC6.1 R50.2 R53.1 R54.1 | length 2038
  Top Layer w50: R50.2 D8.1 ; R54.1 2355,1080 2452.5,982.5 2707.5,982.5 2805,885 R53.1
  Bottom Layer w50: IC6.1 1891.91,1015 2047.82,1170.9 2234.1,1170.9 2325,1080 R54.1@2330.41,1080 ; D8.1 2160,664.72 2295.28,800 ; R54.1 R54.1@2330.41,1080 ; C26.1@2391.57,842.5 C26.1 2391.57,807.5 2384.07,800 2295.28,800 ; 2295.28,800 2295.28,1035.28 2321.17,1061.17 2321.17,1070.76 R54.1@2330.41,1080
NetD1_2: D1.2 R45.1 | length 165
  Bottom Layer w50: D1.2 R45.1
NetD2_1: D2.1 R46.2 | length 220.8
  Bottom Layer w50: D2.1 1162.5,2122.5 1162.5,2017.91 1230.41,1950 R46.2
NetD3_2: D3.2 R47.1 | length 189.4
  Bottom Layer w50: R47.1 1216.5,1655.49 1404.51,1655.49 D3.2@1405,1655
NetD4_1: D4.1 R48.2 | length 155
  Bottom Layer w50: D4.1 R48.2
NetD5_1: D5.1 R49.2 | length 286.1
  Bottom Layer w50: R49.2 2562.5,2055 2637.5,1980 D5.1
NetD18_1: D18.1 R57.2 | length 341.4
  Bottom Layer w30: D18.1 5372.5,1700 5400,1672.5 5400,1660.29 5500.29,1560 5610,1560 R57.2
NetD19_1: D19.1 R60.1 | length 257.1
  Bottom Layer w30: R60.1 797.5,3550.05 797.5,3300.05 D19.1
NetD19_2: D19.2 IC8.1 | length 518.5
  Bottom Layer w30: D19.2 980,3377.55 IC8.1
NetD20_1: D20.1 R61.1 | length 184.1
  Bottom Layer w50: R61.1 1277.5,4530.46 1454.52,4530.46 D20.1
NetD20_2: D20.2 IC8.7 | length 629.6
  Bottom Layer w50: IC8.7 1080,4270.24 1237.72,4427.96 D20.2
NetIC1_1: IC1.1 R2.2 R6.1 | length 932.2
  Top Layer w50: R2.2 3957.35,3017.4 4049.75,2925 R6.1
  Bottom Layer w50: R2.2 3957.35,3527.05 4035.84,3605.54 4130.98,3605.54 IC1.1
NetIC1_2: IC1.2 R1.2 R2.1 R4.2 R5.2 | length 1496.7
  Top Layer w30: R5.2 R5.2@3547.63,3308.19 ; R1.2@3547.63,3805.28 R1.2 ; R4.2 3719.09,3811.74 3955.61,3811.74 R2.1 R2.1@3955.3,3815.52
  Bottom Layer w30: R5.2 3547.63,3308.19 3547.63,3805.28 R1.2 R4.2 R4.2@3719.09,3811.74 ; R2.1@3955.61,3811.74 R2.1 4084.19,3813.48 4233.48,3664.18 4233.48,3561.9 4191.32,3519.74 4145.18,3519.74 IC1.2 IC1.2@4136.22,3515.31
NetIC2_1: IC2.1 R10.2 R14.1 | length 932.2
  Top Layer w50: R10.2 3952.35,1697.4 4044.75,1605 R14.1
  Bottom Layer w50: R10.2 3952.35,2207.05 4030.84,2285.54 4125.98,2285.54 IC2.1
NetIC2_2: IC2.2 R9.2 R10.1 R12.2 R13.2 | length 1490.6
  Top Layer w30: R12.2 R12.2@3721.74,2491.74 ; R12.2@3722.91,2497.57 R12.2@3724.96,2495.52 ; R10.1@3950.3,2495.52 R10.1 R10.1@3950.61,2491.74
  Bottom Layer w30: R13.2 3538.96,1984.52 3538.96,2488.96 R9.2 R12.2 3721.74,2491.74 3950.61,2491.74 R10.1 4079.19,2493.48 4228.48,2344.18 4228.48,2241.9 4186.32,2199.74 4140.18,2199.74 IC2.2 IC2.2@4131.22,2195.31
NetIC3_1: IC3.1 R18.2 R22.1 | length 932.2
  Top Layer w50: R18.2 3960,397.57 4052.4,305.16 R22.1
  Bottom Layer w50: R18.2 3960,907.21 4038.5,985.71 4133.64,985.71 IC3.1
NetIC3_2: IC3.2 R17.2 R18.1 R20.2 R21.2 | length 1478
  Top Layer w30: R20.2@3730.57,1197.74 R20.2@3732.61,1195.69 ; R18.1@3957.95,1195.69 R18.1
  Bottom Layer w30: R21.2 3550.28,688.36 3550.28,1195.28 R17.2 R20.2 ; R20.2@3732.61,1195.69 3957.95,1195.69 R18.1 4086.84,1193.64 4236.14,1044.35 4236.14,942.07 4193.97,899.9 4147.83,899.9 IC3.2 IC3.2@4138.87,895.47
NetIC4_1: IC4.1 R28.2 R29.1 | length 1465
  Top Layer w30: R29.1 2782.9,4359.74 3037.9,4104.73 3037.9,3442.9 2955,3360 R28.2
  Bottom Layer w30: IC4.1 2784.02,3551.96 2947.35,3388.62 2947.35,3352.65 R28.2
NetIC4_2: IC4.2 R27.2 R28.1 | length 402.7
  Top Layer w30: R27.2 2947.9,3652.1 R28.1
NetIC7_1: IC7.1 R51.2 R52.2 R55.1 | length 907.3
  Bottom Layer w50: IC7.1 2462.09,2635.76 2472.09,2645.76 R55.1 2496.33,2641.93 2556.33,2641.93 2777.5,2420.76 R51.2 R52.2
NetJ1_3: J1.3 R1.1 R4.1 | length 2881.4
  Bottom Layer w30: J1.3 1818.58,4931.42 2025,4725 2952.35,4725 3552.35,4125 R1.1 R4.1
NetJ1_4: J1.4 R9.1 R12.1 | length 4263.7
  Top Layer w30: R9.1 R12.1
  Bottom Layer w30: J1.4 1709.88,4944.97 1989.85,4665 2859.85,4665 3345,4179.85 3345,2915 3470,2790 R9.1
NetJ1_5: J1.5 R17.1 R20.1 | length 5471.7
  Bottom Layer w30: J1.5 1601.18,4968.82 1885,4685 1885,3196.8 2231.8,2850 2970,2850 3289.5,2530.5 3289.5,1840.5 3555,1575 R17.1 R20.1
NetQ_1: Q.1 R57.1 | length 626
  Bottom Layer w30: R57.1 5636.57,1833.43 5681.57,1833.43 5835,1680 Q.1
NetR26_2: R26.2 R27.1 | length 960.9
  Bottom Layer w30: R26.2 2467.9,4560 2747.64,4560 2947.9,4359.74 R27.1
NetR58_1: R58.1 R62.2 | length 150
  Bottom Layer w30: R58.1 R62.2
OE: IC5.1 IC5.15 R32.1 S1.1 | length 1020.5
  Bottom Layer w30: IC5.15 5427.28,4265 5527.28,4165 5625,4165 IC5.1 ; R32.1 5625,3855 5625,4152.4 IC5.1 ; S1.1 5805,4165 IC5.1
PWM1_Gsc: IC5.11 J2.3 R40.2 | length 2693.5
  Bottom Layer w30: J2.3 4334.66,5561.44 4334.66,5495.66 4335,5495.32 4335,5265 4260,5190 3921.99,5190 3861.42,5129.43 3861.42,4791.08 3932.49,4720 4694.85,4720 4744.6,4670.25 4794.75,4670.25 R40.2 4802.63,4667.63 5322.37,4667.63 IC5.11
PWM2_Gsc: IC5.5 J2.20 R38.2 | length 3564.3
  Bottom Layer w30: J2.20 3837.85,5798.41 4144.45,6105 5205,6105 5535,5775 5535,4640.5 5588,4587.5 5588.13,4587.5 5610.63,4565 IC5.5 5644.29,4571.7 5726.7,4571.7 5805,4650 R38.2
PWM3_Gsc: IC5.9 J2.14 R44.2 | length 1547.1
  Bottom Layer w30: J2.14 4493.74,5684.58 4584.07,5684.58 4650,5618.66 4650,5205 4690,5165 4967.5,5165 5245,5165 5325,5085 R44.2 IC5.9
PWM3A: IC5.10 P2.1 R43.2 | length 2460.4
  Top Layer w30: R43.2 5175,3990 5820,3345 6017.43,3345 6022.86,3339.57 6050.43,3339.57 v1(6060,3330) ; P2.1@6165,3065 P2.1
  Bottom Layer w30: R43.2 5177.5,4767.5 5322.5,4767.5 IC5.10 ; v1(6060,3330) 6130,3260 6130,3067.5 6147.5,3050 P2.1
PWM3B: IC5.6 P2.10 R41.2 | length 3062
  Bottom Layer w30: IC5.6 5644.29,4671.7 5683.56,4671.7 5771.86,4760 6100,4760 6160.93,4699.07 6165.11,4699.07 6195,4669.18 R41.2 6195,4650 6582,4263 6582,2742 6490,2650 P2.10
PWM4_Gsc: IC5.7 J2.23 R42.2 | length 4153.9
  Bottom Layer w30: J2.23 3511.75,5851.75 3925,6265 5360,6265 5640,5985 5640,5135.25 R42.2 5768.14,5130 5885,5013.14 5885,4890 5840,4845 5757.5,4845 5684.2,4771.7 5644.29,4771.7 IC5.7
PWM4A: IC5.2 P2.4 R33.2 | length 2005.6
  Top Layer w30: R33.2 5800.82,4260 5770.93,4230.11 5770.93,4225.93 5745,4200 5745,3879.75 6024.75,3600 6165,3600 6450,3315 v1(6450,3210)
  Bottom Layer w30: IC5.2 5640.1,4262.5 5802.5,4262.5 R33.2 ; P2.4 6372.5,2950 6450,3027.5 v1(6450,3210)
PWM4B: IC5.14 P2.9 R35.2 | length 2796.3
  Top Layer w30: R35.2 4845,4113.92 5970,2988.92 v1(5970,2717.5)
  Bottom Layer w30: R35.2 4860,4305 4920,4365 IC5.14 ; v1(5970,2717.5) 6037.5,2650 P2.9
PWM5_Gsc: IC5.3 J2.17 R34.2 | length 3536.8
  Bottom Layer w30: J2.17 4171.61,5688.56 4171.61,5865 4271.61,5965 5054.85,5965 5475,5544.85 5475,4500.5 5588,4387.5 5588.13,4387.5 5610.63,4365 IC5.3 5838.14,4365 5925,4451.86 5925,4590 R34.2
PWM5A: IC5.12 P2.5 R39.2 | length 2568.2
  Top Layer w30: R39.2 5025,4055.15 5990.15,3090 v1(6000.21,3090)
  Bottom Layer w30: R39.2 5027.63,4567.63 5322.37,4567.63 IC5.12 ; v1(6000.21,3090) 6000.21,3076.47 6024.57,3052.11 6024.57,2900.43 6075,2850 P2.5
PWM5B: IC5.4 P2.8 R37.2 | length 2501.4
  Top Layer w30: R37.2 5830,4470 5935,4365 6128.14,4365 6535,3958.14 6535,2890 v1(6450,2805)
  Bottom Layer w30: IC5.4 5640.1,4467.5 5812.5,4467.5 R37.2 ; P2.8 6410,2750 6410,2751.47 6450,2791.47 v1(6450,2805)
PWM6_Gsc: IC5.13 J2.12 R36.2 | length 2759.8
  Bottom Layer w30: J2.12 3348.7,5527.16 3270,5448.46 3270,5202.25 3812.25,4660 4670,4660 4830,4500 4862.57,4500 4897.57,4465 IC5.13
RESET: J2.2 R31.1 SW1.1 SW1.2 | length 1319.8
  Bottom Layer w30: R31.1 4121.48,4818.52 3962.11,4818.52 SW1.2 SW1.1 4309.8,5077.95 4435.71,5203.86 J2.2
sigGND: C4.2 C8.2 C12.2 C16.1 C17.2 C30.2 D12.1 D13.1 D16.1 D17.1 D18.2 IC1.3 IC1.5 IC2.3 IC2.5 IC3.3 IC3.5 IC4.3 IC4.5 IC5.8 IC8.4 NT1.0 P1.16 P2.13 R33.1 R34.1 R35.1 R36.1 R37.1 R38.1 R39.1 R40.1 R41.1 R42.1 R43.1 R44.1 R63.1 S1.2 | length 25596.6
  Top Layer w30: v1(795,4422.55) 1335.33,4422.55 1679.4,4078.48 ; R63.1 1384.18,3597.55 1402.65,3616.03 1402.65,3620.2 1679.4,3896.95 1679.4,4078.48 ; v1(1995,4005) 1921.52,4078.48 1679.4,4078.48 ; R35.1 4548.14,4301.86 4548.14,4106.86 4830,3825 4948.14,3825 5035,3738.14 5035,3176.86 ; R36.1 4545,4850.25 4665,4970.25 4794.75,4970.25 R40.1 ; v1(4665,2835) 4674.57,2844.57 4702.7,2844.57 5035,3176.86 ; v1(4800,1740) 4807.6,1747.6 4987.6,1747.6 5040,1800 5040,2119.72 5190,2269.72 ; R39.1@5014.75,4860 R39.1 ; R39.1@5025,4885.25 5025,4895.13 5175,5045.13 R43.1@5175,5055 ; R44.1 5325,5355 5175,5205 R43.1 R43.1@5175,5055 ; IC5.8@5620.1,4865 5525.58,4959.52 5270.48,4959.52 R43.1@5175,5055 ; D16.1 D12.1 5355,2104.72 5190,2269.72 ; R38.1@5786.52,4942.35 5805,4960.82 R38.1 R34.1 ; R42.1 5949.43,5130 6000,5079.43 R34.1 ; R37.1 6115,4604.68 6115,4720.89 6195,4800.89 R41.1 R34.1 ; 5035,3176.86 5190,3021.86 5190,2269.72
  Bottom Layer w30: C30.2 v1(795,4422.55) ; IC8.4 1280,3774.93 1296.17,3758.77 1298.78,3758.77 1380,3677.55 R63.1 ; v1(1995,4005) 2375.66,4005 2450.4,4079.74 C16.1 2467.21,4079.05 2467.21,3852.65 IC4.5 2566.52,3851.96 2666.52,3751.96 IC4.3 3058.04,3751.96 3155,3655 3155,2925.15 3395.15,2685 3568.96,2685 3632.91,2748.95 ; NT1.0 3632.91,2748.95 ; IC2.3 4230.14,2093.04 4330.14,1993.04 IC2.5 4450.98,1993.04 4519.85,1924.18 C8.2 4529.11,1755 4771.47,1755 4786.47,1740 v1(4800,1740) ; IC1.3 4235.14,3413.04 4335.14,3313.04 IC1.5 4455.98,3313.04 4524.85,3244.18 C4.2 4524.85,3076.24 4541.01,3060.07 4559.93,3060.07 4665,2955 v1(4665,2835) 4575,2745 4140,2745 4080,2685 3696.86,2685 3632.91,2748.95 ; IC3.3 4237.79,793.21 4337.79,693.21 IC3.5 4458.64,693.21 4527.5,624.35 C12.2@4527.5,472.46 ; C12.2 C12.2@4527.5,472.46 ; R35.1 R36.1 ; R40.1 4800,4950 4879.75,4870.25 R39.1 ; D18.2 D12.1 ; C17.2 C17.2 5431.34,3907.94 5579.28,3760 5710,3760 5880,3930 5940,3930 ; IC5.8 5664.57,4865 5682.04,4882.48 5687.22,4882.48 5753.31,4948.56 5788.56,4948.56 R38.1 ; D16.1 5655,2100 5790,2235 ; S1.2@6070,4015 S1.2 R33.1 6110,4265 6110,4465 R37.1 ; S1.2@6077.5,4007.5 6000,3930 5988.14,3930 5940,3930 ; P2.13 6060,2450 5985,2375 5985,2250 ; C12.2@4527.5,472.46 4553.02,497.98 4561.05,497.98 4573.23,510.16 4690.79,510.16 4850.79,670.16 5029.84,670.16 5352.98,347.02 5352.98,276.11 D13.1 D17.1 6126.2,274.09 6300,447.9 6300,520 P1.16 6417.5,535 6464.86,582.36 6464.86,1770.14 5985,2250 ; 5790,2235 5790,2775 5850,2835 5850,3180 5940,3270 5940,3600 6035,3695 6035,3873.14 5988.14,3920 5940,3920 5940,3930 ; 5790,2235 5805,2250 5985,2250
Vcomp_24: IC8.2 R62.1 R63.2 | length 335.4
  Bottom Layer w30: R62.1 R63.2 IC8.2
Vcomp_500: IC8.6 R59.1 | length 279.4
  Bottom Layer w30: IC8.6 1186.7,4089.66 1186.7,4154.66 1275,4242.96 R59.1
pads on no net: J1.1 J1.6 J1.7 J1.8 J1.9 J1.10 J1.11 J1.12 J1.13 J1.19 J1.20 J2.5 J2.9 J2.13 J3.2 J3.4 J4.2 P1.2 P1.4 P1.6 P1.8 P1.9 P1.10 P1.11 P1.13 P1.14 P1.15 P2.2 P2.3 P2.6 P2.7 P2.11 P2.12 P2.14 P2.15 P2.16 S1.3

## Silkscreen, mask and mechanical layers (free items; w line width, h text height)
Mechanical 13:
  lines w10: 6450,6450 300,6450 ccw(c300,6150) 0,6150 0,300 ccw(c300,300) 300,0 6450,0 ccw(c6450,300) 6750,300 6750,6151.57 ccw(c6450,6151.57) 6450,6451.57

## Text inside footprints (layer, text, board x,y; h text height)
J1: Top Overlay "25" at 835.14,5799.06 h59.06; Top Overlay "14" at 2025.93,5799.06 h59.06; Top Overlay "13" at 775.87,5425.04 h59.06; Top Overlay "1" at 2045.83,5425.04 h59.06
J2: Top Overlay "1" at 4554.25,5429.13 h59.06; Top Overlay "13" at 3284.29,5429.13 h59.06; Top Overlay "14" at 4534.35,5803.15 h59.06; Top Overlay "25" at 3343.56,5803.15 h59.06
P1: Top Overlay "2" at 6265,1335 h50 r270; Top Overlay "1" at 6165,1335 h50 r270; Top Overlay "15" at 6165,475 h50 r270; Top Overlay "16" at 6265,475 h50 r270
P2: Top Overlay "2" at 6260,3150 h50 r270; Top Overlay "1" at 6160,3150 h50 r270; Top Overlay "15" at 6160,2290 h50 r270; Top Overlay "16" at 6260,2290 h50 r270